# Altium PCB PCB2.PcbDoc
Units mil, origin at the board's own origin, x right, y up, seen from the top; angles counter-clockwise.
Board outline 6000 x 4000 mil, 2 copper layers (Top Layer, Bottom Layer); 35 components, 21 nets, 150 pads, 0 vias.
Unrouted connection lines stored in the file: 77.
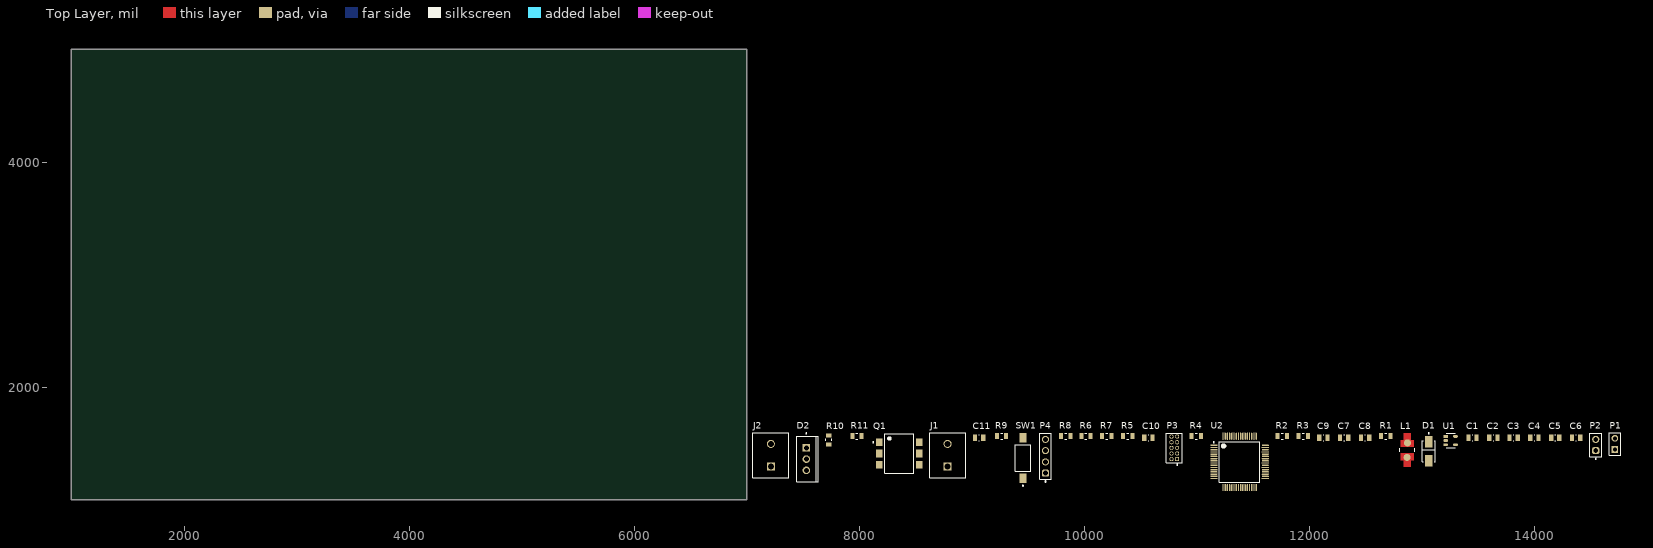
[diagram p0: Top Layer view]
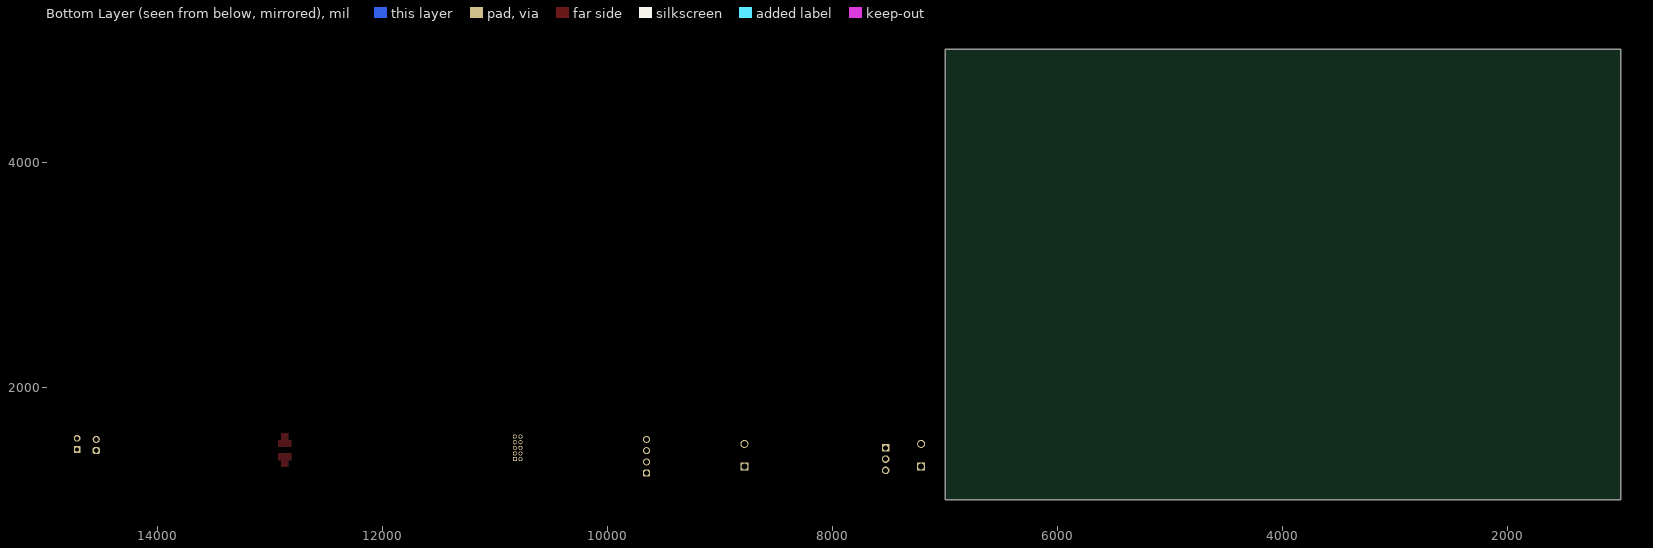
[diagram p1: Bottom Layer view, seen from below]

## Layer stack, top to bottom
Top Solder: solder mask 0.4, Solder Resist, Dk 3.5
Top Layer: signal copper 1.4
Dielectric 1: dielectric 12.6, FR-4, Dk 4.8
Bottom Layer: signal copper 1.4
Bottom Solder: solder mask 0.4, Solder Resist, Dk 3.5

## Board outline
1000,1000 7000,1000 7000,5000 1000,5000

## Design rules (kind name [scope] priority, off if disabled: settings)
Clearance [All] p1: gap=10 ignorepadtopadclearanceinfootprint=FALSE
PolygonConnect [All] p1: connectstyle=Relief reliefconductorwidth=10 reliefentries=4 polygonreliefangle="90 Angle" airgapwidth=10
RoutingVias [All] p1: holewidth=28 width=50 viastyle="Through Hole" minholewidth=28 minwidth=50 maxholewidth=28 maxwidth=50
SolderMaskExpansion [All] p1: expansion=4 istentingtop=FALSE
SupplyNets "Schematic Supply Nets_4" [InNet('+3V3')] p1: voltage=0.000
SupplyNets "Schematic Supply Nets_3" [InNet('BATT')] p2: voltage=0.000
SupplyNets "Schematic Supply Nets_2" [InNet('GND')] p3: voltage=0.000
SupplyNets "Schematic Supply Nets_1" [InNet('~230')] p4: voltage=0.000
SupplyNets "Schematic Supply Nets" [InNet('~N')] p5: voltage=0.000
Width [All] p1: maxlimit=10 minlimit=10 preferedwidth=10
30 further rules are at their usual default settings.

## Components (designator, comment, footprint, x,y, rotation, side; value= is the part's Value field where it differs from the comment)
C1 "10uF" FP-CC0805-0_85-MFG 13450,1550 r0 top value="100 nF"
C2 "100nF" FP-CC0805-0_85-MFG 13635,1550 r0 top value="100 nF"
C3 "100nF" FP-CC0805-0_85-MFG 13815,1550 r0 top value="100 nF"
C4 "100nF" FP-CC0805-0_85-MFG 14000,1550 r0 top value="100 nF"
C5 "100nF" FP-CC0805-0_85-MFG 14185,1550 r0 top value="100 nF"
C6 "1uF" FP-CC0805-0_85-MFG 14370,1550 r0 top value="100 nF"
C7 "10pF" FP-CC0805-0_85-MFG 12310,1550 r0 top value="100 nF"
C8 "10uF" FP-CC0805-0_85-MFG 12495,1550 r0 top value="100 nF"
C9 "4.7uF" FP-CC0805-0_85-MFG 12125,1550 r0 top value="100 nF"
C10 "100nF" FP-CC0805-0_85-MFG 10570,1550 r0 top value="100 nF"
C11 "100nF" FP-CC0805-0_85-MFG 9065,1550 r0 top value="100 nF"
D1 "SS14" FP-403AE-MFG 13060,1430 r90 top
D2 "MAC228A6G" ONSC-TO-220-3-221A-09 7530,1360 r0 top
J1 "1729128" PHOE-1729128-2_V 8785,1395 r90 top
J2 "1729128" PHOE-1729128-2_V 7215,1395 r90 top
L1 "10uH" FP-LQH43CN_03-MFG 12870,1440 r90 top
P1 "Header 2" HDR1X2 14715,1445 r90 top
P2 "61300211121" 61300211121 14545,1485 r90 top
P3 "62201021121" 62201021121 10800,1460 r90 top
P4 "61300411121" 61300411121 9655,1385 r90 top
Q1 "MOC3021SR2VM" FP-646BY-MFG 8355,1410 r0 top
R1 "1M Ohm" FP-RMCF0805-MFG 12680,1565 r0 top
R2 "600k Ohm" FP-RMCF0805-MFG 11760,1565 r0 top
R3 "10k Ohm" FP-RMCF0805-MFG 11945,1565 r0 top
R4 "10k Ohm" FP-RMCF0805-MFG 10995,1565 r0 top
R5 "10k Ohm" FP-RMCF0805-MFG 10385,1565 r0 top
R6 "10k Ohm" FP-RMCF0805-MFG 10015,1565 r0 top
R7 "4k7 Ohm" FP-RMCF0805-MFG 10200,1565 r0 top
R8 "4k7 Ohm" FP-RMCF0805-MFG 9835,1565 r0 top
R9 "1k Ohm" FP-RMCF0805-MFG 9265,1565 r0 top
R10 "1k Ohm" FP-RMCF0805-MFG 7730,1530 r90 top
R11 "1k Ohm" FP-RMCF0805-MFG 7980,1565 r0 top
SW1 "FSMSMTR" TECO-FSMSMTR_V 9455,1370 r90 top
U1 "AP3031KTR-G1" SOT23-6_DIO 13255,1525 r0 top
U2 "STM32L053R8T6D" STM-LQFP64_L 11380,1335 r0 top

## Footprints (in the part's own frame and the unit in brackets; to place one, negate y for a bottom-side part, rotate by r counter-clockwise, add the part's x,y. Pads: shape width x height; smd on the part's side, far side on the other; paste and mask are expansions set on the pad)
61300211121 [mm] "Pin Header, pitch 2.54 mm, THT, Vertical, single row, 2p"
  rrect50% 1.6x1.6 hole 1.1: 1(-1.27,0)
  round 1.6 hole 1.1: 2(1.27,0)
  silkscreen extent -3.26,-1.35 2.69,1.35, body extent -2.54,-1.27 2.54,1.27, height 8.57
61300411121 [mm] "Pin Header, pitch 2.54 mm, THT, Vertical, single row, 4p"
  rrect50% 1.6x1.6 hole 1.1: 1(-3.81,0)
  round 1.6 hole 1.1: 2(-1.27,0) 3(1.27,0) 4(3.81,0)
  silkscreen extent -5.8,-1.35 5.23,1.35, body extent -5.08,-1.27 5.08,1.27, height 8.57
62201021121 [mm] "Pin Header, pitch 1.27 mm, THT, Vertical, dual row, 10p"
  rrect50% 0.95x0.95 hole 0.65: 1(-2.54,-0.635)
  round 0.95 hole 0.65: 2(-2.54,0.635) 3(-1.27,-0.635) 4(-1.27,0.635) 5(0,-0.635) 6(0,0.635) 7(1.27,-0.635) 8(1.27,0.635) 9(2.54,-0.635) 10(2.54,0.635)
  silkscreen extent -3.93,-1.78 3.32,1.78, body extent -3.17,-1.7 3.18,1.7, height 5.33
FP-403AE-MFG [mm]
  rect 2.65x1.75 smd paste+0 mask+0: 1(-2.15,0) 2(2.15,0)
  silkscreen extent -2.37,-1.48 4.17,1.48, body extent -3.57,-1.58 3.57,1.58, height 0.25
FP-646BY-MFG [mm]
  rect 1.52x1.78 smd paste+0 mask+0: 1(-4.505,2.54) 2(-4.505,0) 3(-4.505,-2.54) 4(4.505,-2.54) 5(4.505,0) 6(4.505,2.54)
  silkscreen extent -5.95,-4.44 3.3,4.44, body extent -5.37,-4.67 5.37,4.67, height 0.25
FP-CC0805-0_85-MFG [mm]
  rect 0.95x1.4 smd paste+0 mask+0: 1(-0.925,0) 2(0.925,0)
  silkscreen extent -0.08,-0.72 0.08,0.72, body extent -1.6,-1.05 1.6,1.05, height 0.25
FP-LQH43CN_03-MFG [mil]
  round 63.12 smd paste+0 mask+0: 1(-64.59,1.85) 2(64.59,-1.85)
  Top Layer region: 147.64,29.53 88.58,29.53 88.58,59.06 29.53,59.06 29.53,-59.06 88.58,-59.06 88.58,-29.53 147.64,-29.53 147.64,29.53
  Top Layer region: -147.64,29.53 -88.58,29.53 -88.58,59.06 -29.53,59.06 -29.53,-59.06 -88.58,-59.06 -88.58,-29.53 -147.64,-29.53 -147.64,29.53
  silkscreen extent -15,-67 15,67, body extent -152,-71 152,71, height 10
FP-RMCF0805-MFG [mm]
  rect 0.9x1.3 smd paste+0 mask+0: 1(-1.05,0) 2(1.05,0)
  silkscreen extent -0.23,-0.67 0.23,0.67, body extent -1.6,-0.77 1.6,0.77, height 0.25
HDR1X2 [mm] "Connector; Header; 2 Position"
  rect 1.5x1.5 hole 0.9: 1(0,0)
  round 1.5 hole 0.9: 2(2.54,0)
  silkscreen extent -1.27,-1.27 3.81,1.27
ONSC-TO-220-3-221A-09 [mm] "FM, 3-Leads, Body 10.3x4.85mm, Pitch 2.54mm"
  rect 1.7x1.7 hole 1.1: 1(0,2.54)
  round 1.7 hole 1.1: 2(0,0) 3(0,-2.54)
  silkscreen extent -2.2,-5.15 2.7,5.92, body extent -2.18,-5.15 2.67,5.15, height 19.85
PHOE-1729128-2_V [mm] "Receptacle, 2-Leads, Body 8.1x10.16mm, Pitch 5.08mm"
  rect 1.8x1.8 hole 1.3: 1(-2.54,0)
  round 1.8 hole 1.3: 2(2.54,0)
  silkscreen extent -5.08,-4.05 5.08,4.05, body extent -5.65,-4.05 5.08,4.05, height 10.01
SOT23-6_DIO [mm]
  rect 1.06x0.65 smd paste+0 mask+0: 1(-1.1,0.95)
  oval 1.06x0.65 smd paste+0 mask+0: 2(-1.1,0) 3(-1.1,-0.95) 4(1.1,-0.95) 5(1.1,0.95)
  silkscreen extent -1,-1.63 1,1.63, body extent -1.28,-1.5 1.28,1.5, height 1.45
STM-LQFP64_L [mm] "QFP, 64-Leads, Body 10x10mm, Pitch 0.5mm, IPC High Density"
  oval 1.6x0.3 smd: 1(-5.8,3.75) 2(-5.8,3.25) 3(-5.8,2.75) 4(-5.8,2.25) 5(-5.8,1.75) 6(-5.8,1.25) 7(-5.8,0.75) 8(-5.8,0.25) 9(-5.8,-0.25) 10(-5.8,-0.75) 11(-5.8,-1.25) 12(-5.8,-1.75) 13(-5.8,-2.25) 14(-5.8,-2.75) 15(-5.8,-3.25) 16(-5.8,-3.75) 33(5.8,-3.75) 34(5.8,-3.25) 35(5.8,-2.75) 36(5.8,-2.25) 37(5.8,-1.75) 38(5.8,-1.25) 39(5.8,-0.75) 40(5.8,-0.25) 41(5.8,0.25) 42(5.8,0.75) 43(5.8,1.25) 44(5.8,1.75) 45(5.8,2.25) 46(5.8,2.75) 47(5.8,3.25) 48(5.8,3.75)
  oval 0.3x1.6 smd: 17(-3.75,-5.8) 18(-3.25,-5.8) 19(-2.75,-5.8) 20(-2.25,-5.8) 21(-1.75,-5.8) 22(-1.25,-5.8) 23(-0.75,-5.8) 24(-0.25,-5.8) 25(0.25,-5.8) 26(0.75,-5.8) 27(1.25,-5.8) 28(1.75,-5.8) 29(2.25,-5.8) 30(2.75,-5.8) 31(3.25,-5.8) 32(3.75,-5.8) 49(3.75,5.8) 50(3.25,5.8) 51(2.75,5.8) 52(2.25,5.8) 53(1.75,5.8) 54(1.25,5.8) 55(0.75,5.8) 56(0.25,5.8) 57(-0.25,5.8) 58(-0.75,5.8) 59(-1.25,5.8) 60(-1.75,5.8) 61(-2.25,5.8) 62(-2.75,5.8) 63(-3.25,5.8) 64(-3.75,5.8)
  silkscreen extent -5.92,-4.6 4.6,4.6, body extent -5,-5 5,5, height 1.6
TECO-FSMSMTR_V [mm] "SMD, 2-Leads, Body 6x3.5mm, Pitch 9.19mm"
  rect 2.2x1.6 smd: 1(-4.595,0)
  rect 2.18x1.6 smd: 2(4.595,0)
  silkscreen extent -6.37,-1.75 3,1.75, body extent -4.98,-1.75 4.98,1.75, height 4.4

## Part data
C1 C2 C3 C4 C5 C6 C7 C8 C9 C10 C11: library part CMP-2100-03606-3, "CAP CER 0.1UF 50V X7R 0805", Capacitance="100 nF", Manufacturer=Yageo, Manufacturer Part Number=CC0805KRX7R9BB104, Package=CC0805-0.85, Temperature="-30°C to +85°C", Temperature Characteristic=X7R, Temperature Range High=+85°C, Temperature Range Low=-30°C, Tolerance=0.1, Voltage Rating="50 V", Automotive=No, Category=Cap, ComponentLink2Description=Datasheet, ComponentLink2URL=http://www.yageo.com/documents/recent/UPY-GPHC_Y5V_6.3V-to-50V_8.pdf, Device Class L1="Passive Components", Device Class L2=Capacitors, Device Class L3="Ceramic Capacitors", Digikey Description="CAP CER 0.1UF 50V X7R 0805", Footprint Url=http://www.yageo.com/exep/pages/download/literatures/UPY-C_GEN_24.pdf, Height=0.95mm, Ipc Land Pattern Name=CAPC200125X85, Lead Free=Yes, Material=Ceramic, Mouser Description="Multilayer Ceramic Capacitors MLCC - SMD/SMT 100nF 50V X7R 10%", Octopart=https://octopart.com/cc0805krx7r9bb104-yageo-192993, RoHS=TRUE
D1: library part CMP-2000-04943-2, "DIODE SCHOTTKY 40V 1A SMA", Forward Current=1A, Manufacturer="ON Semiconductor", Max Junction Temp=+125°C, Max Repetitive Reverse Voltage=40V, Max Surge Forward Current=40A, Package=403AE, Peak Reverse Current=0.2mA, Temperature="-65°C to +125°C", Temperature Range Low=-65°C, Automotive=No, Category=Diode, ComponentLink2Description=Datasheet, ComponentLink2URL=https://www.onsemi.com/pub/Collateral/SS19-D.PDF, Device Class L1="Discrete Semiconductors", Device Class L2=Diodes, Device Class L3="Schottky Diodes", Digikey Description="DIODE SCHOTTKY 40V 1A SMA", Height=2.5mm, Lead Free=Yes, Manufacturer Part Number=SS14, Mouser Description="Schottky Diodes & Rectifiers SMA 40V 1.0A", Octopart=https://octopart.com/ss14-on+semiconductor-29205033, RoHS=TRUE, Standoff Height=0.05mm, Temperature Range High=+125°C
D2: library part CMP-1070-00099-1, "Sensitive Gate Triacs, Silicon Bidirectional Thyristor, 3-Pin TO-220, Pb-Free, Bulk Box", Manufacturer="On Semiconductor", ComponentLink1Description="Manufacturer URL", ComponentLink1URL=http://www.onsemi.com/, ComponentLink2Description=Datasheet, ComponentLink2URL=http://www.onsemi.com/pub_link/Collateral/MAC228A-D.PDF, ComponentLink3Description="Package Specification", ComponentLink3URL=http://www.onsemi.com/pub_link/Collateral/221A-09.PDF, DatasheetVersion="Rev. 7", IT(RMS) Max (A)=8, ITSM Max (A)=80, Mounting Technology="Through Hole", PackageDescription="3-Pin Flange Mount, Vertical Straight Lead, Body 9.97 x 4.445 mm, Pitch 2.54 mm", PackageReference=TO-220-3-221A-09, PackageVersion="Rev. AG, 09/2011", Packing="Bulk Box", PartNumber=MAC228A6G, RoHS=Pb-Free
J1 J2: library part CMP-2000-05815-1, "PCB Terminal Block, 13.5 A, 400 V, 2-Pin THD, RoHS, Bulk", Current Rating=13500mA, Manufacturer="Phoenix Contact", Package Description="2-Pin Through Hole Device, Body 8.1 x 10.16 mm, Pitch 5.08 mm", Package Reference=1729128-2, Package Version=03/2015, Voltage Rating=400V, Datasheet URL=https://datasheet.ciiva.com/16046/1729128-16046181.pdf, Datasheet Version=12/2013, Manufacturer URL=http://www.phoenixcontact.com/, Mounting Technology=ThroughHole, No. of Positions=2, No. of Rows=1, Orientation=Horizontal, Package URL=https://www.phoenixcontact.com/online/portal/pi/pxc/product_detail_page/!ut/p/b1/3VdJjqNKFDxLH8AFycySyWY2ozFsEPOMMQaDOX1XedGL_1Vdm5YXJleknhSKeBkvI6EA8ncAo3AYoDhBQGco6KN7VURTdemj9us_IEKEZo_YHiPAEWEFmDGOHMORkqKYCORBZxgL7ZoaZYcbFFUZ3fqxSY6GOuxydWUuHqz1ynmMFygu583Bob0Ewr6Sd_l-5m-kAueHiB0jpRwZwe58wwtkpxtMYd_LmGcDRU02dRNEyWt6Y2ti5pSyJ_reIkzIulrqApdnbT11V5jnCKbYNCvhEM1MCpPByat_X379-iThf08CI5GfOPqfBeS3BRoBOdD55AKVv0iLwCMq-2BrzXWSGRH7pUGD9uwXQjiph3xL0DKQwdGa0JImiIOmBNOestqgwTHSSs2oOep-78apyXQBvNi8ZLaFjvjWvcaUEBu0MC6Wbe-d6mB0FAebo2lUWinqYaZs5DAYzV0RP9yitUjnGJ0iI9xhZkT42OCQNUJJhkgWINNQLP2JFP6OpMg3JCVg70jqHT0lvKOnhHf0lPuOnnLf0VPuWx6_dxwUIvwk5WMkT0kLL1mh61l2yZVSzG3pYV_bqo-mj6uMKwKwdnnW8Jh5RTOJzMOA5c-eJDaZQw4mTMPH02PvS_ZAqNVjVTo2WyYLkwH_KU1mmmG5kjRhDqPXLwwVHvVOjCM60-fpXvTDfMGW1PVFVS1r4e4yVDk4ZdNbkUHvqPqQSeian4UD39fNKmachqdJ1NJbyk8rXT9mXTvPk3oE5meulKGgiruPJek-4I9hTT6G8ZLOyRSm2RRVbThERQad5OS28hdt4YW4vG0stgYYzsWsK4_7y6DZMjJSCqri1kyiZR5vD7pwIrNR7QwPHTcLTI5qT7eRlpHrdGiupYlqQDJ7zy_CND8fWWBoLRXxk1RVcXiBQwbTD4Xi7KL-FuO94t9xaqweXzH, Packing=Bulk, PartNumber=1729128, Pitch=5.08mm, RoHS=TRUE
L1: library part CMP-06042-007054-1, "Wire Wound Ferrite Inductor for General Circuits 470μH ±10% 11.8Ω 80mA 1812", Case Code (Imperial)=1812, Case Code (Metric)=4532, Current Rating=80mA, DC Resistance (DCR)=11.8R, Frequency=3MHz, Inductance=470uH, Max Operating Temperature=85°C, Min Operating Temperature=-40°C, Package Quantity=500, Resistor Type=Wirewound, Test Frequency=1kHz, Tolerance=10%, Case/Package=1812, Core Material=Ferrite, DC Current=80mA, Depth=3.4mm, Height=2.6mm, Height - Seated (Max)=0.11inch, Lead Free="Lead Free", Length=4.5mm, Max DC Current=80mA, Military Standard=Not, Mount="Surface Mount", Packaging="Tape and Reel", Q Factor=40, Radiation Hardening=No, Self Resonant Frequency=3MHz, Series Resistance=11.8R, Shielding=Unshielded, Termination=SMD/SMT, Weight=0.004586oz, Width=3.2mm
P1: "Header, 2-Pin", LatestRevisionDate=17-Jul-2002, LatestRevisionNote="Re-released for DXP Platform.", Publisher="Altium Limited"
P2: library part CMP-1712-00002-6, Color=Black, Contact Resistance=20mΩ, Current Rating=3A, Max Operating Temperature=125°C, Min Operating Temperature=-40°C, Operating Supply Voltage=250V, Connector Type="Male Pin", Contact Gender=Male, Contact Material=Copper, Contact Mating Length=5.9944mm, Contact Plating=Gold, Gender=Male, Height=8.94mm, Housing Material=PBT, Lead Free="Lead Free", Lead Pitch=2.54mm, Mount="Through Hole", NexarPartId=20081794, Number of Contacts=2, Number of Pins=2, Number of Positions=2, Number of Rows=1, Orientation=Vertical, Packaging=Bulk, Pitch=2.54mm, REACH SVHC="No SVHC", RoHS=Compliant, Termination="Through Hole", Voltage Rating=250V
P3: library part CMP-1502-00948-3, Color=Black, Contact Resistance=20mΩ, Current Rating=1A, Max Operating Temperature=105°C, Min Operating Temperature=-40°C, Operating Supply Voltage=100V, Connector Type="Male Pin", Contact Material=Copper, Contact Mating Length=3.81mm, Contact Plating=Gold, Gender=Male, Height=5.65mm, Lead Pitch=1.27mm, Mount="Through Hole", NexarPartId=32855586, Number of Contacts=10, Number of Pins=10, Number of Positions=10, Number of Rows=2, Orientation=Vertical, Packaging=Box, Pitch=1.27mm, REACH SVHC=Unknown, RoHS=Compliant, Row Spacing=1.27mm, Termination=Solder, Voltage Rating=100V
P4: library part CMP-1502-01064-3, Color=Black, Contact Resistance=20mΩ, Current Rating=3A, Max Operating Temperature=105°C, Min Operating Temperature=-40°C, Operating Supply Voltage=250V, Connector Type="Male Pin", Contact Material=Copper, Contact Mating Length=5.9944mm, Contact Plating=Gold, Gender=Male, Height=8.89mm, Lead Free="Lead Free", Lead Pitch=2.54mm, Mount="Through Hole", NexarPartId=32855522, Number of Contacts=4, Number of Pins=4, Number of Positions=4, Number of Rows=1, Orientation=Vertical, Packaging=Bulk, Pitch=2.54mm, REACH SVHC=Unknown, RoHS=Compliant, Termination=Solder, Voltage Rating=250V
Q1: library part CMP-00278-84330366-1, "MOC3021SR2VM Triac Driver Output Optocoupler, 6-Pin DIP 400V Random Phase", Case/Package=SMD/SMT, Forward Current=60mA, Forward Voltage=1.15V, Hold Current=100µA, Isolation Voltage=7.5kV, Manufacturer Lifecycle Status=ACTIVE, Max Input Voltage=1.5V, Max Operating Temperature=85°C, Max Power Dissipation=330mW, Min Operating Temperature=-40°C, Output Voltage=400V, Reverse Breakdown Voltage=3V, Approvals="EN, IEC, UL", Input Current=60mA, Lead Free="Lead Free", Lifecycle Status=Production, Mount="Surface Mount", NexarPartId=84330366, Nominal Input Voltage=1.15V, Number of Channels=1, Number of Circuits=1, Number of Elements=1, Number of Pins=6, Packaging=Digi-Reel®, Power Dissipation=330mW, Radiation Hardening=No, REACH SVHC="No SVHC", RoHS=Compliant, Schedule B="8541408000, 8541408000", Weight=810mg
R1 R2 R3 R4 R5 R6 R7 R8 R9 R10 R11: library part CMP-26527-000017-1, "RES 0 OHM JUMPER 1/8W 0805", Case Code (Imperial)=0805, Case Code (Metric)=2012, Max Operating Temperature=155°C, Max Power Dissipation=125mW, Min Operating Temperature=-55°C, Resistance=0mR, Case/Package=0805, Composition="Thick Film", Contact Plating=Tin, Depth=1.25mm, Features="Automotive AEC-Q200", Height=0.026inch, Lead Free="Lead Free", Length=2mm, Military Standard=Not, Mount="Surface Mount", Number of Terminations=2, Packaging="Tape and Reel", Power Rating=125mW, Radiation Hardening=No, Width=0.049inch
SW1: library part CMP-2000-07501-1, "FSMSM Push Button Switch, 50 mA, -35 to 85 degC, 2-Pin SMD, RoHS, Tape and Reel", Case\/Package=SMD/SMT, Contact Current Rating=50mA, Contact Resistance=100mOhm, Manufacturer="TE Connectivity", Max Operating Temperature=85degC, Max Voltage Rating (DC)=12V, Min Operating Temperature=-35degC, Operating Force=180gf, Package Description="2-Pin Surface Mount Device, Body 6 x 3.5 mm, Pitch 9.19 mm", Package Quantity=1800, Voltage Rating (DC)=24V, Actuator Length=1.07mm, Actuator Material=Polyamide, Contact Material=Brass, Contact Plating=Silver, Current Rating=50mA, Datasheet URL=http://www.te.com/commerce/DocumentDelivery/DDEController?Action=showdoc&DocId=Customer+Drawing%7F1437566-3%7FC2%7Fpdf%7FEnglish%7FENG_CD_1437566-3_C2_1437566_3_1_c.dwg.pdf%7F1437566-4, Datasheet Version="Rev. C2, 08/2014", Electrical Life=20000Cycles, ELV=Compliant, Illumination Type=Illuminated, Lead Free=LeadFree, Manufacturer URL=http://www.te.com/, Mechanical Life=20000Cycles, Mount=SurfaceMount, Mounting Technology=SurfaceMount, Orientation=Straight, Package Reference=FSMSMTR, Packaging=TapeandReel, REACH SVHC=Unknown, RoHSCompliant=true, Switch Travel=0.25mm, Termination=GullWing, Throw Configuration=SPST
U1: "No Description Available", Mfr_Name="Diodes Inc", RefDes=RefDes, Type=Type
U2: library part CMP-1546-00063-2, "Ultra-low-power 32-Bit MCU ARM-based Cortex-M0+, 64 KB Flash, 8 KB RAM, 51 I/Os, 64-Pin LQFP, -40 to 85 degC, Tray", I/Os (High Current)=51, Operating Frequency(F) (Processor speed) (MHz)=32, Package Description="64-Pin Low-profile Quad Flat Package, Body 10 x 10 mm, Pitch 0.5 mm", Package Reference=LQFP64, Supply Voltage(Vcc) min (V)=1.65, ComponentLink1Description="Manufacturer URL", ComponentLink1URL=http://www.st.com/, ComponentLink2Description=Datasheet, ComponentLink2URL=http://www.st.com/st-web-ui/static/active/en/resource/technical/document/datasheet/DM00105960.pdf, Core="ARM Cortex-M0+", D/A Converter=1, Data E2PROM nom (B)=2048, DatasheetVersion="Rev. 5", FLASH Size (Prog) (kB)=64, Internal RAM Size (kB)=8, Mounting Technology="Surface Mount", Packing=Tray

## Nets (pads, with @x,y where several pads share a name; then routed paths per layer and width w, separated by ;. In a path a pad name is that pad's centre, name@x,y a point inside that pad or via, vN(x,y) a via of type N, cw(c..) or ccw(c..) an arc to the next point about the centre after c; other vN are vias at no path point)
+3V3: C1.1 C2.1 C3.1 C4.1 C5.1 C6.1 C7.1 C8.1 C10.1 D1.2 P3.1 P4.3 R1.2 R3.2 R6.2 R7.2 R8.2 U2.13 U2.19 U2.32 U2.64
BATT: C9.1 D1.1 L1.2 P1.1 U1.4 U1.5
FAN_CTRL: R10.2 U2.26
GND: C1.2 C2.2 C3.2 C4.2 C5.2 C6.2 C8.2 C9.2 C10.2 C11.2 P1.2 P3.3 P3.5 P4.4 Q1.2 R2.1 R4.1 R5.2 SW1.1 U1.2 U2.12 U2.18 U2.31 U2.47 U2.63
I2C_SCL: P4.2 R8.1 U2.58
I2C_SDA: P4.1 R7.1 U2.59
NetC7_2: C7.2 R1.1 R2.2 U1.3
NetC11_1: C11.1 R6.1 R9.1 U2.7
NetD2_2: D2.2 J1.1
NetD2_3: D2.3 Q1.4
NetL1_1: L1.1 U1.1
NetQ1_1: Q1.1 R10.1
NetQ1_6: Q1.6 R11.2
NetR5_1: R5.1 U2.60
RESET_PIN: P3.10 R9.2 SW1.2
SWD_CLK: P3.4 R4.2 U2.49
SWD_DIO: P3.2 R3.1 U2.46
UART_RX: P2.1 U2.43
UART_TX: P2.2 U2.42
~230: D2.1 J2.1 R11.1
~N: J1.2 J2.2
pads on no net: P3.6 P3.7 P3.8 P3.9 Q1.3 Q1.5 U2.1 U2.2 U2.3 U2.4 U2.5 U2.6 U2.8 U2.9 U2.10 U2.11 U2.14 U2.15 U2.16 U2.17 U2.20 U2.21 U2.22 U2.23 U2.24 U2.25 U2.27 U2.28 U2.29 U2.30 U2.33 U2.34 U2.35 U2.36 U2.37 U2.38 U2.39 U2.40 U2.41 U2.44 U2.45 U2.48 U2.50 U2.51 U2.52 U2.53 U2.54 U2.55 U2.56 U2.57 U2.61 U2.62